# Altium PCB Power_Embedded_Board.PcbDoc (part 1 of 2)
Units mil, origin at the board's own origin, x right, y up, seen from the top; angles counter-clockwise.
Board outline 7315 x 2525 mil, 4 copper layers (Top Layer, Ground, Battery Voltage, Bottom Layer), stack 30.634 mil thick; 158 components, 109 nets, 580 pads, 136 vias.
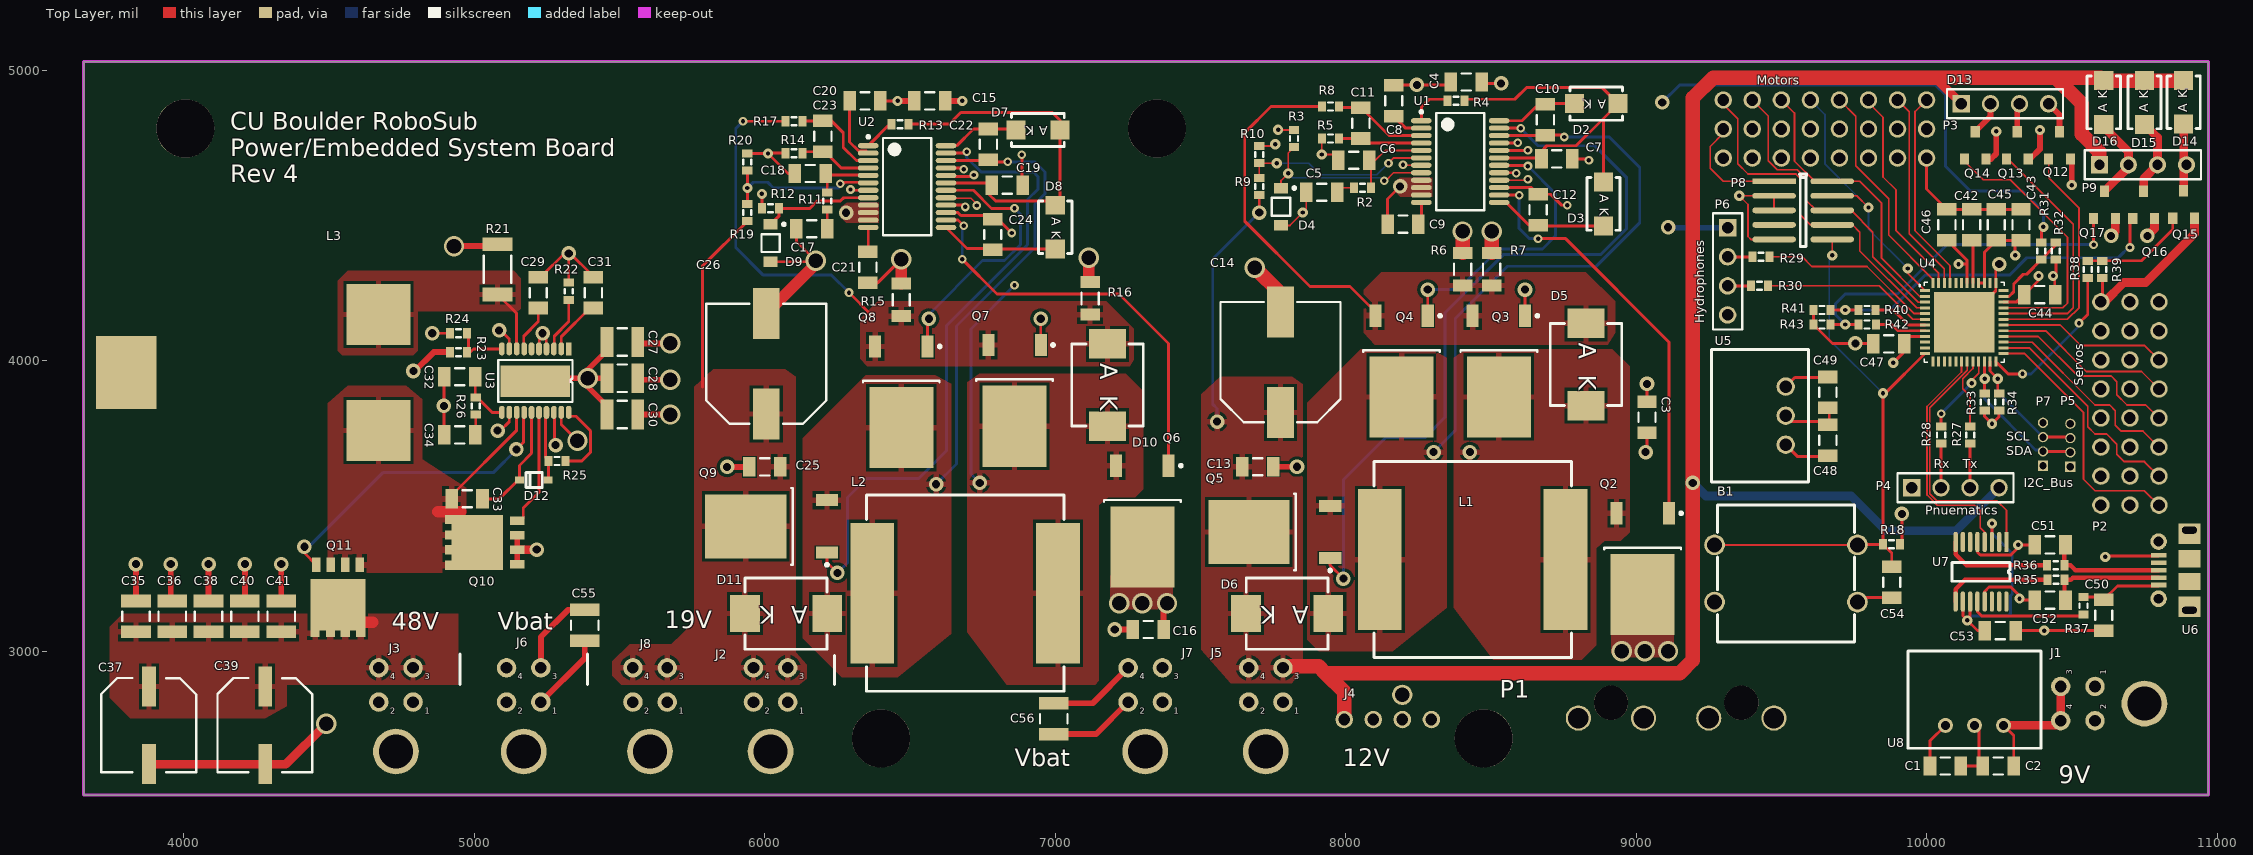
[diagram p0: Top Layer view]
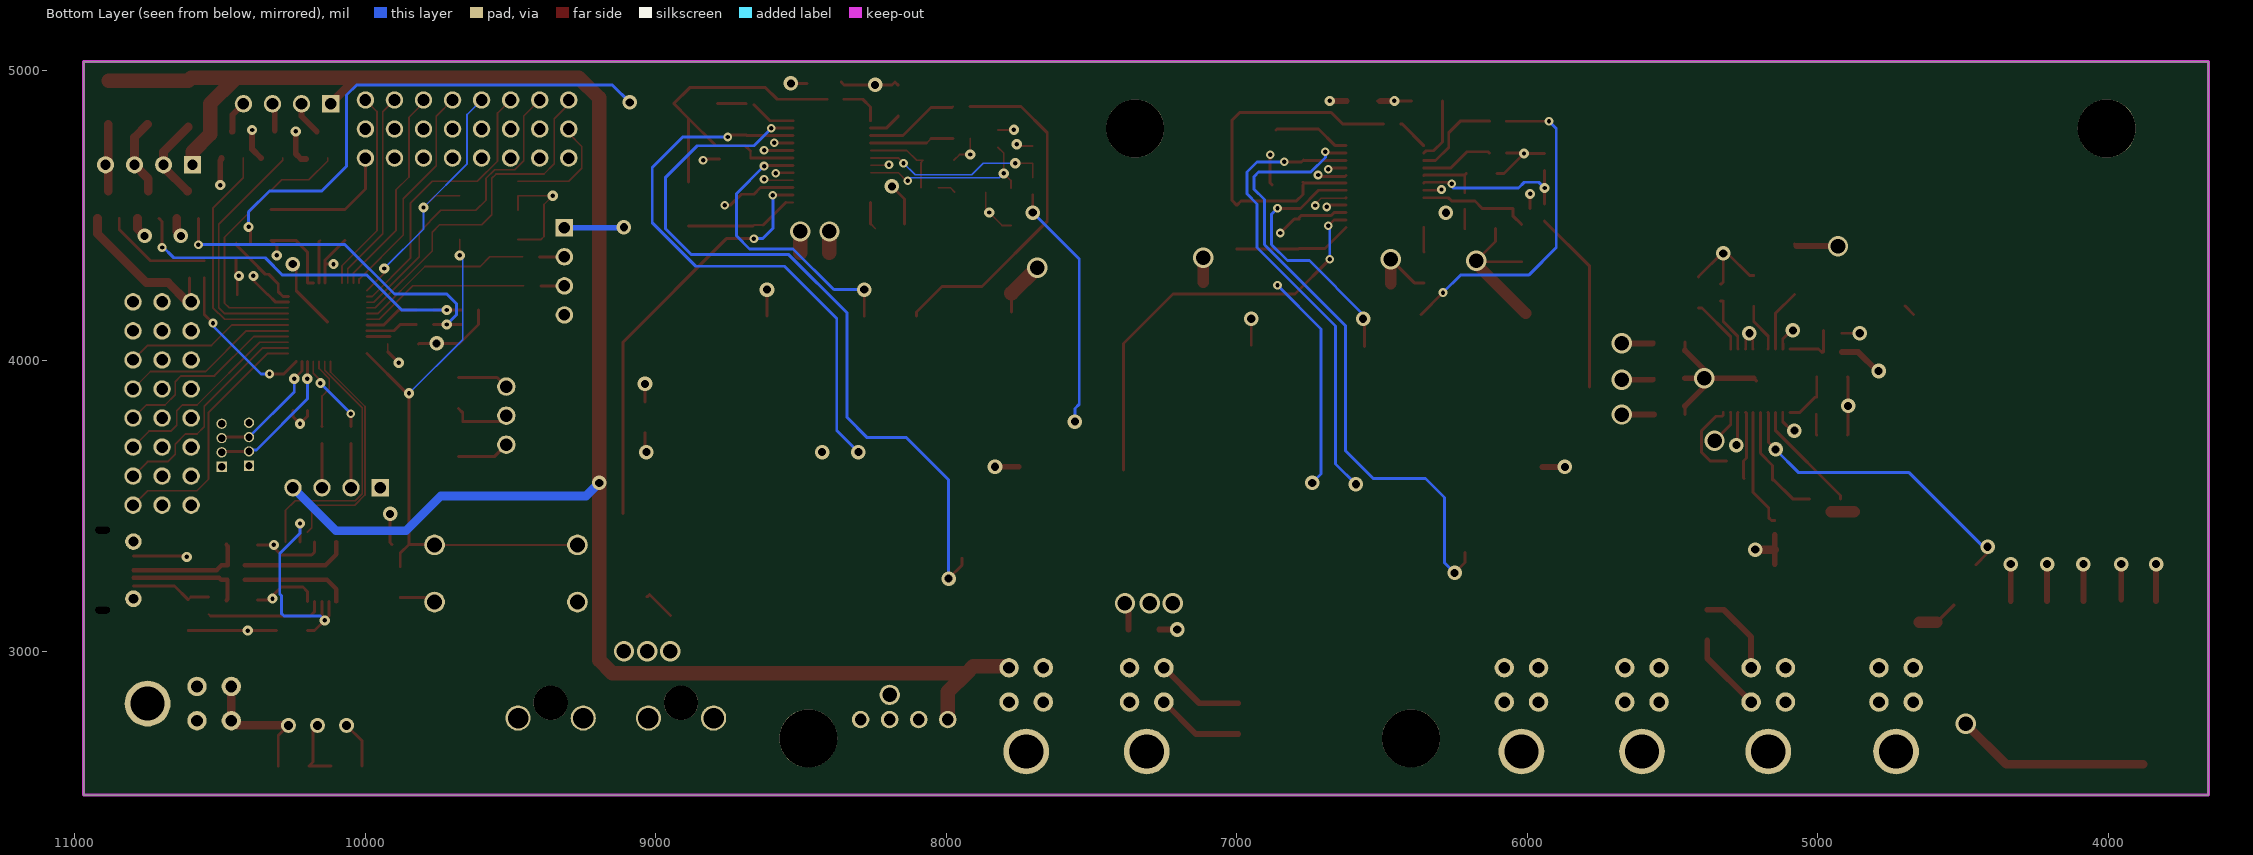
[diagram p1: Bottom Layer view, seen from below]
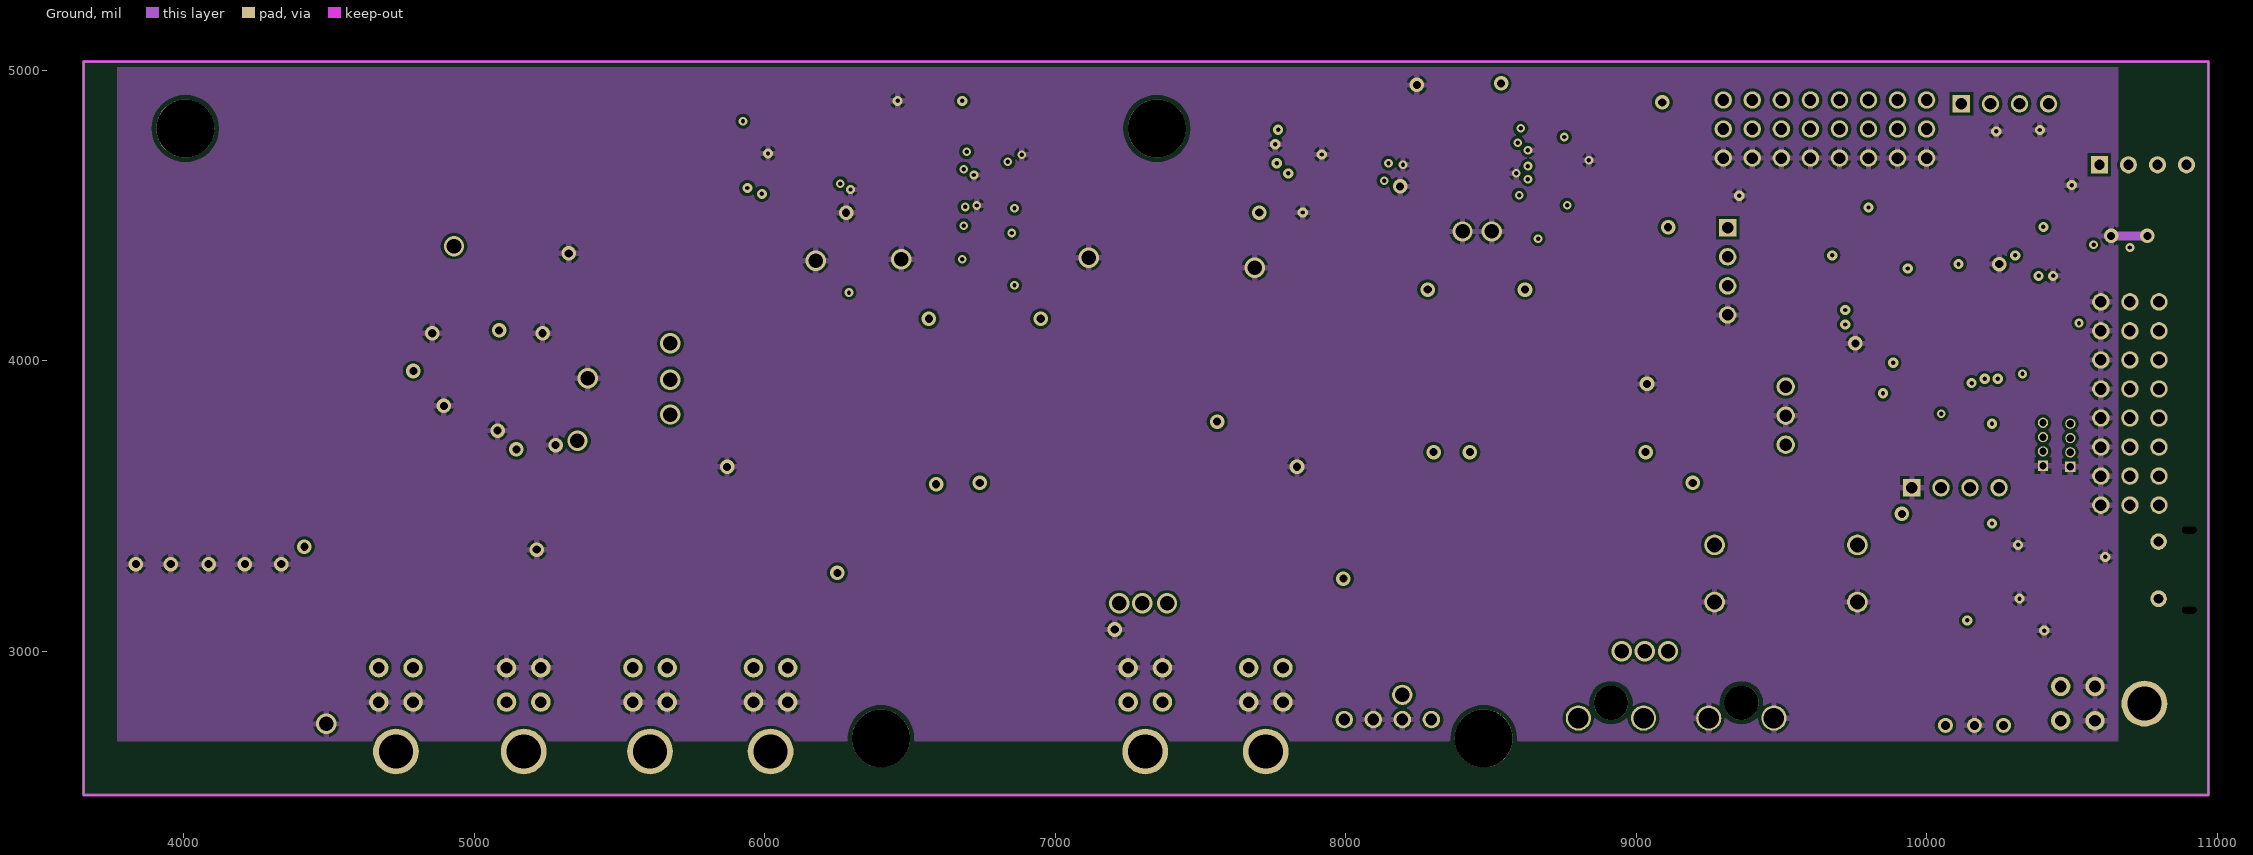
[diagram p2: Ground]
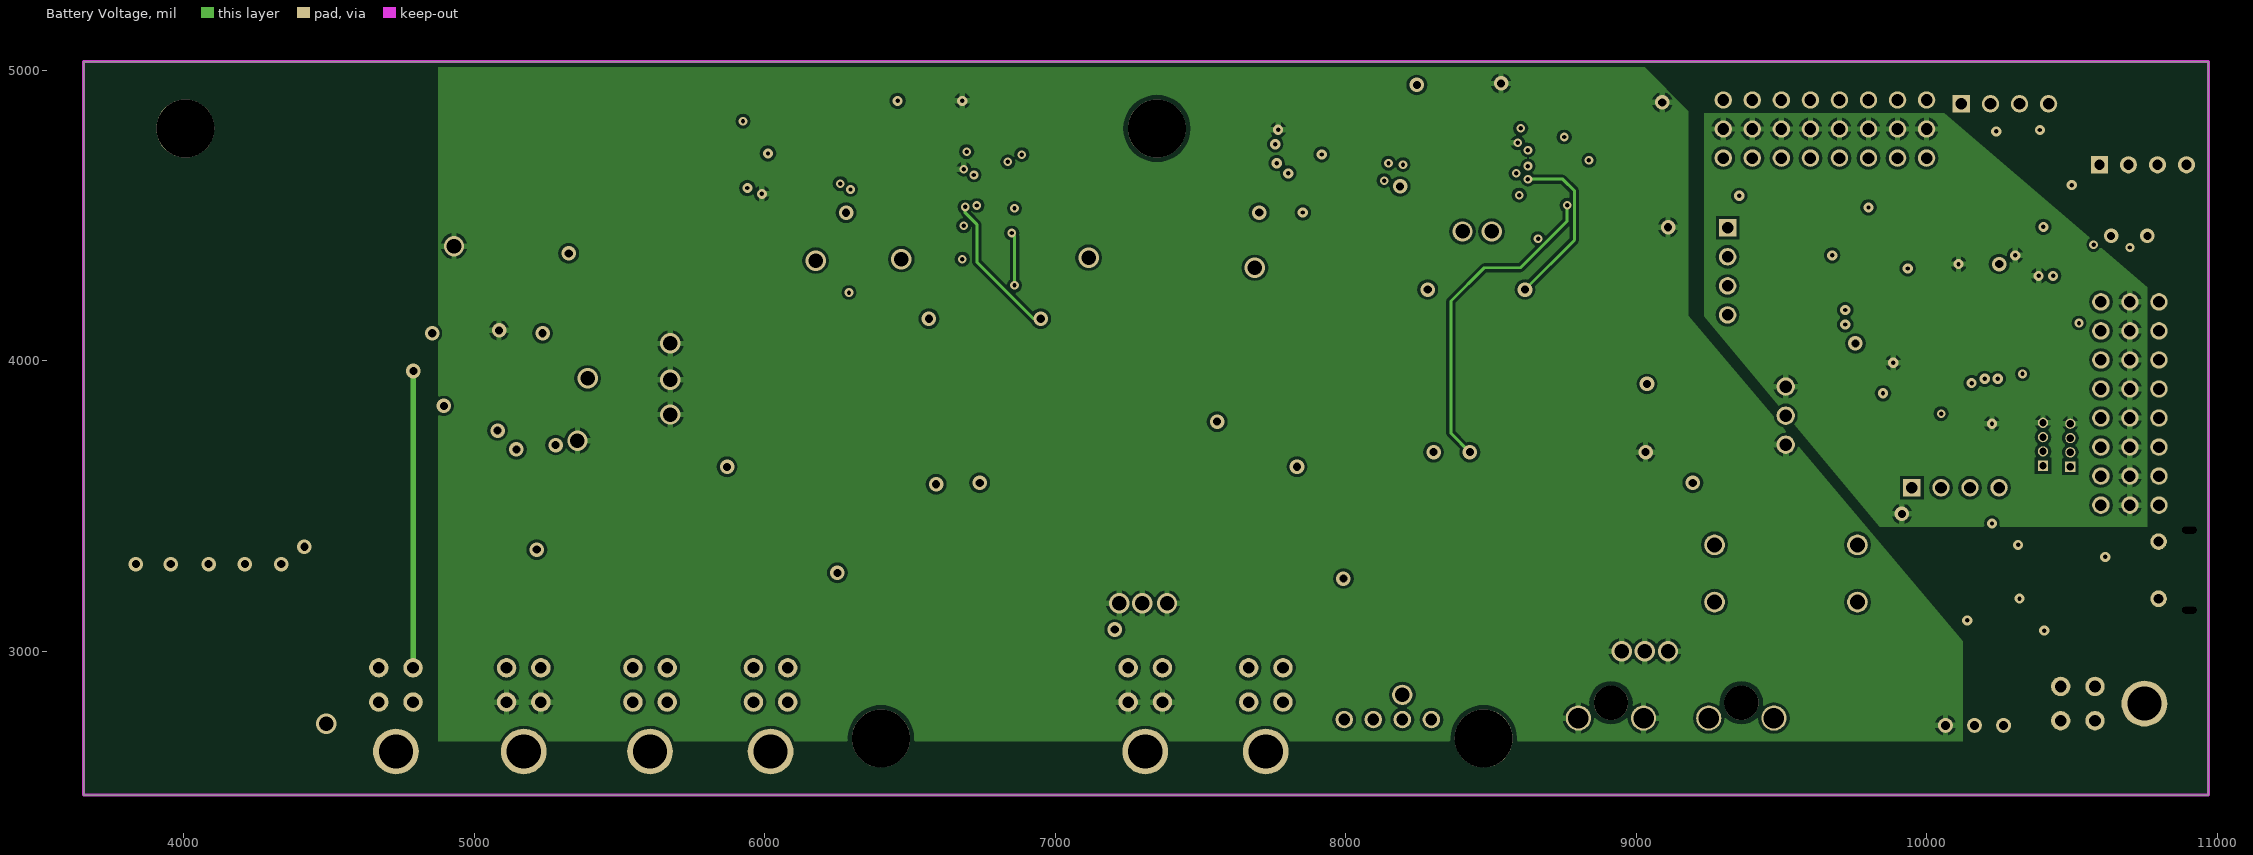
[diagram p3: Battery Voltage]

## Layer stack, top to bottom
Top Solder: solder mask 0.4, Solder Resist, Dk 3.5
Top Layer: signal copper 1.4
Dielectric 1: core 10, FR-4, Dk 4.2
Ground: signal copper 1.417
Dielectric 3: prepreg 5, Dk 4.2
Battery Voltage: signal copper 1.417
Dielectric 2: core 10, Dk 4.2
Bottom Layer: signal copper 1.4
Bottom Solder: solder mask 0.4, Solder Resist, Dk 3.5

## Board outline
3655,2505 10970,2505 10970,5030 3655,5030

## Design rules (kind name [scope] priority, off if disabled: settings)
BoardOutlineClearance [All] p1: gap=7.87 ignorepadtopadclearanceinfootprint=FALSE
Clearance [All] p1: gap=5 ignorepadtopadclearanceinfootprint=TRUE except(3.5: Arc-Arc Arc-Track Arc-SMDPad Track-Track Track-SMDPad SMDPad-SMDPad SMDPad-Fill SMDPad-Poly SMDPad-Region; 10: Arc-Fill Arc-Poly Arc-Region Arc-Hole Track-Fill Track-Poly Track-Region Track-Hole SMDPad-Hole THPad-Fill THPad-Poly THPad-Region THPad-Hole Via-Fill Via-Poly Via-Region Via-Hole Text-Hole; 15: Fill-Hole Poly-Hole Region-Hole)
DiffPairsRouting [All] p1: maxlimit=10 minlimit=10 mostfreqgap=10 toplayer_minwidth=15 toplayer_maxwidth=15 toplayer_prefwidth=15 midlayer1_minwidth=15 midlayer1_maxwidth=15 midlayer1_prefwidth=15 midlayer2_minwidth=15 midlayer2_maxwidth=15 midlayer2_prefwidth=15 bottomlayer_minwidth=15 bottomlayer_maxwidth=15 bottomlayer_prefwidth=15 maxuncoupledlength=500
HoleSize [All] p1: absolutevalues=TRUE maxlimit=248.03 minlimit=7.87 maxpercent=80.000 minpercent=20.000
MinimumAnnularRing [All] p1: minimumring=3
MinimumSolderMaskSliver [All] p1: minsoldermaskwidth=3.5
PolygonConnect PolygonConnect_1 [All vs IsNamedPolygon('GND_TOP_19V','Vbat_TOP_19V','Top Layer-NetC33_1','Vbat_TOP_19V','GND_TOP_12V','Vbat_TOP_12V')] p1: connectstyle=Direct reliefconductorwidth=10 reliefentries=4 polygonreliefangle="90 Angle" airgapwidth=10
PolygonConnect [All] p2: connectstyle=Relief reliefconductorwidth=20 reliefentries=4 polygonreliefangle="90 Angle" airgapwidth=10
RoutingVias [All] p1: holewidth=15 width=30 viastyle="Through Hole" minholewidth=7.87 minwidth=17.72 maxholewidth=30 maxwidth=75
ShortCircuit ShortCircuit1 ['U6-0'] p1: allowed=TRUE // USB_Port
ShortCircuit [All] p2: allowed=FALSE
SilkToSilkClearance [All] p1: silktosilkclearance=0
SilkToSolderMaskClearance [IsPad] p1: minsilkscreentomaskgap=1 clearancetoexposedcopper=TRUE
SolderMaskExpansion [All] p1: expansion=2.5
UnpouredPolygon UnpouredPolygon_1 [All] p1:
UnpouredPolygon [All] p2:
Width [All] p1: maxlimit=200 minlimit=3.5 preferedwidth=10
23 further rules are at their usual default settings.

## Classes and differential pairs
component class "9V Converter": C1 C2 U8
component class "48V Converter": C27 C28 C29 C30 C31 C32 C33 C34 C35 C36 C37 C38 C39 C40 C41 D12 L3 Q10 Q11 R21 R22 R23 R24 R25 R26 U3
component class "12V Conterter": C3 C4 C5 C6 C7 C8 C9 C10 C11 C12 C13 C14 D2 D3 D4 D5 D6 L1 Q2 Q3 Q4 Q5 R2 R3 R4 R5 R6 R7 R8 R9 R10 U1
component class "19V Converter": C15 C16 C17 C18 C19 C20 C21 C22 C23 C24 C25 C26 D7 D8 D9 D10 D11 L2 Q6 Q7 Q8 Q9 R11 R12 R13 R14 R15 R16 R17 R19 R20 U2
component class "Embedded Circuits": B1 C48 C49 C50 C51 C52 C53 C54 D13 D14 D15 D16 P8 P9 Q12 Q13 Q14 Q15 Q16 Q17 R18 R35 R36 R37 R38 R39 R40 R41 R42 R43 U5 U6 U7
component class "Embedded System": P2 P3 P4 P5 P6 P7 R27 R28 R29 R30
component class Power_Embedded_Board_Top: C55 C56 J1 J2 J3 J4 J5 J6 J7 J8 P1
component class Embedded_Chip: C42 C43 C44 C45 C46 C47 R31 R32 R33 R34 U4
differential pair USBData: +USBData_P -USBData_N
differential pair USBD: +USBD_P -USBD_N

## Components (designator, comment, footprint, x,y, rotation, side; value= is the part's Value field where it differs from the comment)
B1 "Push Button" "PUSH BUTTON" 9270,3169.45 r0 top
C1 "Cap" C1206 10065,2605 r180 top value=22uF
C2 "Cap" C1206 10246.85,2605 r0 top value=22uF
C3 "Cap Semi" C1206 9037.39,3805.53 r270 top value=22u
C4 "Cap Semi" C1206 8415,4960 r0 top value=3.3u
C5 "Cap Semi" C1206 7917.39,4580.53 r0 top value=0.01u
C6 "Cap Semi" C1206 8027.39,4690.53 r0 top value=100p
C7 "Cap Semi" C1206 8727.39,4695.53 r180 top value=4.7u
C8 "Cap Semi" C1206 8165.54,4895.53 r270 top value=0.001u
C9 "Cap Semi" C1206 8197.39,4470.53 r0 top value=0.001u
C10 "Cap Semi" C1206 8687.39,4830.53 r90 top value=0.22u
C11 "Cap Semi" C1206 8052.39,4818.68 r90 top value=100p
C12 "Cap Semi" C1206 8662.39,4520.53 r270 top value=0.22u
C13 "Cap Semi" C1206 7697.39,3635.53 r180 top value=22u
C14 "390uF" PCVXXXXXMCLXGS 7775.54,3995.53 r90 top
C15 "Cap Semi" C1206 6568.15,4895 r0 top value=22u
C16 "Cap Semi" C1206 7320,3075 r0 top value=3.3u
C17 "Cap Semi" C1206 6161.85,4455 r0 top value=0.01u
C18 "Cap Semi" C1206 6156.85,4645 r0 top value=100p
C19 "Cap Semi" C1206 6835,4605 r180 top value=4.7u
C20 "Cap Semi" C1206 6345,4895 r180 top value=0.001u
C21 "Cap Semi" C1206 6355,4321.85 r90 top value=0.001u
C22 "Cap Semi" C1206 6770,4745 r90 top value=0.22u
C23 "Cap Semi" C1206 6200,4773.15 r90 top value=100p
C24 "Cap Semi" C1206 6785,4435 r270 top value=0.22u
C25 "Cap Semi" C1206 6000,3635 r0 top value=22u
C26 "390uF" PCVXXXXXMCLXGS 6005,3990 r90 top
C27 "HMK325C7475KN-TE" C1210 5510,4065 r0 top value=4.7uF
C28 "HMK325C7475KN-TE" C1210 5510,3940 r0 top value=4.7uF
C29 "Cap Semi" C1206 5220,4235 r90 top value=47nF
C30 "HMK325C7475KN-TE" C1210 5510,3815 r0 top value=4.7uF
C31 "Cap Semi" C1206 5410,4235 r270 top value=4.7uF
C32 "Cap Semi" C1206 4950,3945 r0 top value=100pF
C33 "Cap Semi" C1206 4975,3525 r0 top value=100nF
C34 "Cap Semi" C1206 4950,3745 r0 top value=15nF
C35 "HMK325C7475KN-TE" C1210 3835,3120 r270 top value=4.7uF
C36 "HMK325C7475KN-TE" C1210 3960,3120 r270 top value=4.7uF
C37 "33uF" UUX1J330MNL6GS 3880,2745 r270 top
C38 "HMK325C7475KN-TE" C1210 4085,3120 r270 top value=4.7uF
C39 "33uF" UUX1J330MNL6GS 4280,2745 r270 top
C40 "HMK325C7475KN-TE" C1210 4210,3120 r270 top value=4.7uF
C41 "HMK325C7475KN-TE" C1210 4335,3120 r270 top value=4.7uF
C42 "Cap Semi" C1206 10155,4468.15 r90 top value=1uF
C43 "Cap Semi" C1206 10325,4468.15 r270 top value=10nF
C44 "Cap Semi" C1206 10390,4228.15 r180 top value=10nF
C45 "Cap Semi" C1206 10240,4468.15 r270 top value=100nF
C46 "Cap Semi" C1206 10070,4468.15 r270 top value=100nF
C47 "Cap Semi" C1206 9870,4058.15 r0 top value=10uF
C48 "Cap" C1206 9660,3726.3 r270 top value=10uF
C49 "Cap" C1206 9660,3891.3 r90 top value=10uF
C50 "Cap" C1206 10610,3124.45 r90 top value=10nF
C51 "Cap" C1206 10425,3366.3 r0 top value=47pF
C52 "Cap" C1206 10425,3176.3 r0 top value=47pF
C53 "Cap" C1206 10253.15,3071.3 r180 top value=100nF
C54 "Cap Semi" C1206 9880,3238.15 r90 top value=1nF
C55 "HMK325C7475KN-TE" C1210 5380,3090 r90 top value=4.7uF
C56 "HMK325C7475KN-TE" C1210 6995,2768.15 r90 top value=4.7uF
D2 "1N5819HW" 1N58XX 8938.17,4885.53 r180 top
D3 "1N5819HW" 1N58XX 8887.39,4615.53 r270 top
D4 "MMSZ5230B" ONSC-SOD-123-2-425-04_V 7777.39,4530.53 r270 top
D5 "MBRS340" MBRS340 8827.39,4129 r270 top
D6 "MBRS340" MBRS340 7940,3130 r180 top
D7 "1N5819HW" 1N58XX 7015.79,4795 r180 top
D8 "1N5819HW" 1N58XX 7000,4535.79 r270 top
D9 "MMSZ5230B" ONSC-SOD-123-2-425-04_V 6020,4405.63 r270 top
D10 "MBRS340" MBRS340 7180,4058.46 r270 top
D11 "MBRS340" MBRS340 6215,3130 r180 top
D12 "SCHOTTKY" BAS170W 5253.43,3590 r180 top
D13 "RGB LED Strip" "HEADER 1X4" 10120,4885 r0 top
D14 "1N58xx" 1N58XX 10885,4815 r90 top
D15 "1N58xx" 1N58xx 10750,4814.21 r90 top
D16 "1N58xx" 1N58xx 10610,4814.21 r90 top
J1 "Molex 43045-0402" MOLEX43045-0402 10579.92,2760.94 r90 top
J2 "Molex 43045-0402" MOLEX43045-0402 5960.94,2825.08 r0 top
J3 "Molex 43045-0402" MOLEX43045-0402 4670.94,2825.08 r0 top
J4 "Floppy Header" "HEADER 1X4 12V" 8295,2764.96 r180 top
J5 "Molex 43045-0402" MOLEX43045-0402 7665.94,2825.08 r0 top
J6 "Molex 43045-0402" MOLEX43045-0402 5110.94,2825.08 r0 top
J7 "Molex 43045-0402" MOLEX43045-0402 7250.94,2825.08 r0 top
J8 "Molex 43045-0402" MOLEX43045-0402 5545.94,2825.08 r0 top
L1 "IHLP-6767DZ-11" IHLP-6767DZ-11 8756.95,3315.53 r180 top
L2 "IHLP-6767DZ-11" IHLP-6767DZ-11 7009.57,3200 r180 top
L3 "330 uH" PQ2617BHA-330K 4105,3960 r90 top
P1 "Molex2002411114" Molex2002411114 9137.8,2770 r180 top
P2 "Header 8X3" "HEADER 8X3" 10800,4203.15 r180 top
P3 "Header 8X3" "HEADER 8X3" 9300,4898.15 r270 top
P4 "Header 4" "HEADER 1X4" 9949.53,3563.15 r0 top
P5 "Depth Sensor header" DF13-4P-1.25DSA 10495,3635.79 r90 top
P6 "Header 4" "HEADER 1X4" 9315,4458.15 r270 top
P7 "Header 4" DF13-4P-1.25DSA 10400.79,3638.94 r90 top
P8 "FTSH-105-01-L-DV-K-TR" FTSH-105-01-L-DV-K-TR 9475,4618.15 r0 top
P9 "Header 4" HDR1X4 10595,4675 r0 top
Q2 "BUK6212" NXP-SOT428_M 9022.39,3286.09 r270 top
Q3 "BUK6212" NXP-SOT428_M 8527.39,3966.09 r270 top
Q4 "BUK6212" NXP-SOT428_M 8192.39,3966.09 r270 top
Q5 "BUK6212" NXP-SOT428_M 7757.39,3410.53 r180 top
Q6 "BUK6212" NXP-SOT428_M 7300,3450 r270 top
Q7 "BUK6212" NXP-SOT428_M 6860,3865.55 r270 top
Q8 "BUK6212" NXP-SOT428_M 6470,3860.55 r270 top
Q9 "BUK6212" NXP-SOT428_M 6025,3430 r180 top
Q10 "N-Channel MOSFET" BSC028N06LS3 5010,3375 r0 top
Q11 "N-Channel MOSFET" BSC028N06LS3 4530,3160 r90 top
Q12 "DMN1019USN" SOT-23 10420.2,4695 r0 top
Q13 "DMN1019USN" SOT-23 10275,4695 r0 top
Q14 "DMN1019USN" SOT-23 10130,4695 r0 top
Q15 "DMN1019USN" SOT-23 10847.6,4490.51 r0 top
Q16 "DMN1019USN" SOT-23 10710,4490 r0 top
Q17 "DMN1019USN" SOT-23 10575.2,4490 r0 top
R2 "Res3" J1-0603 8057.39,4595.53 r0 top value=100k
R3 "Res3" J1-0603 7822.39,4765.53 r90 top value=51k
R4 "Res3" J1-0603 8380,4895 r180 top value=100k
R5 "Res3" J1-0603 7947.39,4765.53 r180 top value=100
R6 "Res3" R1206 8402.39,4315.53 r270 top value=0.018
R7 "Res3" R1206 8502.39,4315.53 r270 top value=0.018
R8 "Res3" J1-0603 7947.39,4875.53 r180 top value=100
R9 "Res3" J1-0603 7702.39,4600.53 r270 top value=280k
R10 "Res3" J1-0603 7702.39,4710.06 r270 top value=20k
R11 "Res3" J1-0603 6215,4550 r90 top value=100k
R12 "Res3" J1-0603 6020,4525 r180 top value=51k
R13 "Res3" J1-0603 6465,4815 r180 top value=100k
R14 "Res3" J1-0603 6100.47,4715 r180 top value=100
R15 "Res3" R1206 6470,4210 r270 top value=0.018
R16 "Res3" R1206 7120,4215 r270 top value=0.018
R17 "Res3" J1-0603 6100.47,4825 r180 top value=100
R18 "Res3" J1-0603 9879.53,3368.15 r0 top value=47k
R19 "Res3" J1-0603 5940,4510.47 r270 top value=113k
R20 "Res3" J1-0603 5940,4684.53 r270 top value=2k
R21 "Res3" 12Z-2010 5080,4315 r90 top value=3m
R22 "Res3" J1-0603 5325,4239.53 r90 top value=30.1K
R23 "Res3" J1-0603 4945.47,4030 r0 top value=390K
R24 "Res3" J1-0603 4945.47,4095 r0 top value=10K
R25 "Res3" J1-0603 5285,3655 r180 top value=100K
R26 "Res3" J1-0603 5005,3845 r90 top value=15K
R27 "Res3" J1-0603 10150,3744.53 r270 top value=20
R28 "Res3" J1-0603 10050,3744.53 r270 top value=20
R29 "Res3" J1-0603 9430,4358.15 r0 top value=20
R30 "Res3" J1-0603 9425,4258.15 r0 top value=20
R31 "Res3" J1-0603 10395,4378.15 r90 top value=10K
R32 "Res3" J1-0603 10445,4378.15 r90 top value=2K
R33 "Res3" J1-0603 10200,3858.15 r90 top value=4.7K
R34 "Res3" J1-0603 10250,3858.15 r90 top value=4.7K
R35 "Res3" J1-0603 10445.47,3246.3 r0 top value=27
R36 "Res3" J1-0603 10444.53,3296.3 r180 top value=27
R37 "Res3" J1-0603 10540,3156.77 r270 top value=0
R38 "Res3" J1-0603 10555,4315 r90 top value=1k
R39 "Res3" J1-0603 10605,4315 r90 top value=10k
R40 "Res3" J1-0603 9795,4175 r180 top value=1k
R41 "Res3" J1-0603 9640.47,4175 r0 top value=10k
R42 "Res3" J1-0603 9795.47,4125 r180 top value=1k
R43 "Res3" J1-0603 9640.47,4125 r0 top value=10k
U1 "LTC3780EG#PBF" LT-G-24_L 8394.39,4685.97 r0 top
U2 "LTC3780EG#PBF" LT-G-24_L 6490,4600 r0 top
U3 "LTC3769" LTC3769 5325,4041.22 r270 top
U4 "EFM32PG12B500F1024IM48-C" QFN50P700X700X90-49N 10130,4133.15 r0 top
U5 "R-78E3.3-1.0" R-78EXX-1.0 9515,3711.3 r90 top
U6 "Micro USB" "MICRO USB" 10905,3153.39 r90 top
U7 "FT230x" FT230X 10275,3376.3 r270 top
U8 "R-78E9.0-0.5" R-78Exx-0.5 10065,2745 r0 top

## Footprints (in the part's own frame and the unit in brackets; to place one, negate y for a bottom-side part, rotate by r counter-clockwise, add the part's x,y. Pads: shape width x height; smd on the part's side, far side on the other; paste and mask are expansions set on the pad)
1N58XX [mm] "1A Schottky Barrier Rectifier Diode"
  rect 1.655x1.67 smd: A(0,0) K(3.83,0)
  silkscreen extent -0.39,-1.45 4.22,1.45
1N58xx [mm] "1A Schottky Barrier Rectifier Diode"
  rect 1.655x1.67 smd: A(0,0) K(3.83,0)
  silkscreen extent -0.39,-1.45 4.22,1.45
12Z-2010 [mm] "Chip Resistor, Body 5.0x2.5mm, IPC High Density"
  rect 1.2x2.6 smd: 1(-2.2,0) 2(2.2,0)
  silkscreen extent -1.2,-1.2 1.2,1.2, body extent -2.58,-1.33 2.58,1.33, height 0.9
BAS170W [mm] "SCHOTTKY DIODE"
  rect 0.8x0.6 smd: A(0,0) K(2.5,0)
  silkscreen extent 0.5,-0.65 1.92,0.65
BSC028N06LS3 [mm] "N-Channel MOSFET"
  rect 1.3x0.75 smd: 1(3.5,-1.9) 2(3.5,-0.635) 3(3.5,0.635) 4(3.5,1.9)
  rect 0.6x0.8 smd: 5(-2.5,2) 6(-2.5,0.65) 7(-2.5,-0.65) 8(-2.5,-2)
  rect 4.5x4.8 smd: 9(0,0)
C1206 [mm] "Chip Capacitor, Body 3.2x1.6mm, IPC High Density"
  rect 1.1x1.7 smd: 1(-1.35,0) 2(1.35,0)
  silkscreen extent -0.4,-0.75 0.4,0.75, body extent -1.7,-0.9 1.7,0.9, height 1.3
C1210 [mm] "Chip Capacitor, Body 3.2x2.5mm, IPC High Density"
  rect 1.1x2.6 smd: 1(-1.35,0) 2(1.35,0)
  silkscreen extent -0.4,-1.2 0.4,1.2, body extent -1.7,-1.35 1.7,1.35, height 1.3
DF13-4P-1.25DSA [mm] "Depth Sensor Header footprint"
  rect 0.9x0.9 hole 0.65: 1(0,0)
  round 0.9 hole 0.65: 2(1.25,0) 3(2.5,0) 4(3.75,0)
FT230X [mil] "USB to BASIC UART IC"
  rect 70x15 smd: 1(0,0)
  oval 70x15 smd: 2(0,-25) 3(0,-50) 4(0,-75) 5(0,-100) 6(0,-125) 7(0,-150) 8(0,-175) 9(205,-175) 10(205,-150) 11(205,-125) 12(205,-100) 13(205,-75) 14(205,-50) 15(205,-25) 16(205,0)
  silkscreen extent 70,-188 135,13
FTSH-105-01-L-DV-K-TR [mil] "CONN HEADER 10POS DUAL .05\" SMD"
  rect 150x20 smd: 1(0,0)
  oval 150x20 smd: 2(200,0) 3(0,-50) 4(200,-50) 5(0,-100) 6(200,-100) 7(0,-150) 8(200,-150) 9(0,-200) 10(200,-200)
  silkscreen extent 88,-225 112,25
HDR1X4 [mm] "Connector; Header; 4 Position"
  rect 1.5x1.5 hole 0.9: 1(0,0)
  round 1.5 hole 0.9: 2(2.54,0) 3(5.08,0) 4(7.62,0)
  silkscreen extent -1.27,-1.27 8.89,1.27
"HEADER 1X4" [mil]
  rect 60x60 hole 40: 1(0,0)
  round 60 hole 40: 2(100,0) 3(200,0) 4(300,0)
  silkscreen extent -50,-50 350,50
"HEADER 1X4 12V" [mm]
  round 1.778 hole 1.25: 0(2.54,-2.16)
  round 1.528 hole 1.02: 1(0,0) 2(2.54,0) 3(5.08,0) 4(7.62,0)
"HEADER 8X3" [mil] "Connector Header Through Hole 24 position 0.1\""
  round 60 hole 40: 1(0,700) 2(100,700) 3(200,700) 4(0,600) 5(100,600) 6(200,600) 7(0,500) 8(100,500) 9(200,500) 10(0,400) 11(100,400) 12(200,400) 13(0,300) 14(100,300) 15(200,300) 16(0,200) 17(100,200) 18(200,200) 19(0,100) 20(100,100) 21(200,100) 22(0,0) 23(100,0) 24(200,0)
IHLP-6767DZ-11 [mm] "15µH Shielded Molded Inductor 14A 14.4 mOhm Max Nonstandard"
  rect 3.825x12.32 smd: 1(0,0) 2(16.245,0)
  silkscreen extent -0.52,-8.57 16.77,8.57
J1-0603 [mm] "Chip Resistor, Body 1.6x0.8mm, IPC High Density"
  rect 0.7x0.9 smd: 1(-0.75,0) 2(0.75,0)
  silkscreen extent -0.2,-0.35 0.2,0.35, body extent -0.85,-0.48 0.85,0.48, height 0.9
LT-G-24_L [mm] "SOP, 24-Leads, Body 8.5x5.6mm, Pitch 0.65mm, IPC High Density"
  oval 1.8x0.45 smd mask+0.055: 1(-3.4,3.575) 2(-3.4,2.925) 3(-3.4,2.275) 4(-3.4,1.625) 5(-3.4,0.975) 6(-3.4,0.325) 7(-3.4,-0.325) 8(-3.4,-0.975) 9(-3.4,-1.625) 10(-3.4,-2.275) 11(-3.4,-2.925) 12(-3.4,-3.575) 13(3.4,-3.575) 14(3.4,-2.925) 15(3.4,-2.275) 16(3.4,-1.625) 17(3.4,-0.975) 18(3.4,-0.325) 19(3.4,0.325) 20(3.4,0.975) 21(3.4,1.625) 22(3.4,2.275) 23(3.4,2.925) 24(3.4,3.575)
  silkscreen extent -3.52,-4.25 2.1,4.47, body extent -2.8,-4.25 2.8,4.25, height 2
LTC3769 [mm]
  rect 1.15x0.5 smd: 1(0,0)
  oval 1.15x0.5 smd: 2(0,-0.65) 3(0,-1.3) 4(0,-1.95) 5(0,-2.6) 6(0,-3.25) 7(0,-3.9) 8(0,-4.55) 9(0,-5.2) 10(0,-5.85) 11(5.55,-5.85) 12(5.55,-5.2) 13(5.55,-4.55) 14(5.55,-3.9) 15(5.55,-3.25) 16(5.55,-2.6) 17(5.55,-1.95) 18(5.55,-1.3) 19(5.55,-0.65) 20(5.55,0)
  rect 2.74x6.07 smd: 21(2.825,-2.921)
  silkscreen extent 0.97,-6.18 4.65,0.33
MBRS340 [mm] "Schottky Rectifier"
  rect 2.6x3.2 smd: A(0,0) K(7.2,0)
  silkscreen extent 0.02,-3.13 7.17,3.13
"MICRO USB" [mm] "USB - micro B USB 2.0 Receptacle Connector 5 Position Surface Mount, Right Angle"
  round 0 hole 0.6 slot 1.3 at 90 deg unplated: 0(-0.3,0) 0(6.7,0)
  rect 1.8x1.9 smd: 0(0,0) 0(6.4,0)
  round 1.45 hole 0.85: 0(0.7,2.7) 0(5.7,2.7)
  rect 1.5x1.9 smd: 0(2.2,0) 0(4.2,0)
  rect 0.4x1.35 smd: 1(1.9,2.7) 2(2.55,2.7) 3(3.2,2.7) 4(3.85,2.7) 5(4.5,2.7)
MOLEX43045-0402 [mm] "43045-0402"
  round 1.7 hole 1.02: 1(3,0) 2(0,0) 3(3,3) 4(0,3)
  round 4 hole 3 unplated: ""(1.5,-4.32)
  body extent -3.57,-8.95 6.58,3.29, height 8.83
Molex2002411114 [mm]
  round 2.2 hole 1.8: 1(-8.55,0) 2(-2.85,0) 3(2.85,0) 4(8.55,0)
  round 3 hole 3 unplated: ""(-5.7,-1.34) ""(5.7,-1.34)
  body extent -11.72,-3.39 11.73,7.21, height 17.5
NXP-SOT428_M [mm] "DPAK, 3-Leads, Body 6.75x6.22mm, Pitch 2.29mm, IPC Low Density"
  rect 7.1x5.6 smd: D(2.3,0)
  rect 1.95x1.05 smd: G(-4.8,2.29) S(-4.8,-2.29)
  silkscreen extent -4.92,-3.35 -1.65,3.49, body extent -1.8,-3.37 4.42,3.37, height 2.38
ONSC-SOD-123-2-425-04_V [mm] "SOD, 2-Leads, Body 2.69x1.6mm"
  rect 0.91x1.22 smd: 1(-1.635,0) 2(1.635,0)
  silkscreen extent -1.76,-0.8 0.78,1.29, body extent -1.35,-0.8 1.35,0.8, height 1.35
PCVXXXXXMCLXGS [mm] "Aluminum Electrolytic Capacitor, Body 10.30x10.30x12.70mm, IPC Low Density"
  rect 4.45x2.35 smd: 1(-4.4,0) 2(4.4,0)
  silkscreen extent -5.25,-5.25 5.25,5.25, body extent -5.25,-5.25 5.25,5.25, height 12.7
PQ2617BHA-330K [mm] "Inductor"
  rect 5.33x5.59 smd: 1(-5.075,-14.355) 2(5.075,-14.355)
  rect 6.35x5.28 smd: NC(0,7.72)
"PUSH BUTTON" [mm] "Tactile Switch SPST-NO Top Actuated Through Hole"
  round 1.808 hole 1.3: 1(12.5,0) 2(0,0) 3(12.5,5) 4(0,5)
  silkscreen extent 0.25,-3.5 12.25,8.5
QFN50P700X700X90-49N [mm]
  rect 5.3x5.3 smd: 0(0,0)
  rect 0.86x0.26 smd: 1(-3.435,2.75) 2(-3.435,2.25) 3(-3.435,1.75) 4(-3.435,1.25) 5(-3.435,0.75) 6(-3.435,0.25) 7(-3.435,-0.25) 8(-3.435,-0.75) 9(-3.435,-1.25) 10(-3.435,-1.75) 11(-3.435,-2.25) 12(-3.435,-2.75) 25(3.435,-2.75) 26(3.435,-2.25) 27(3.435,-1.75) 28(3.435,-1.25) 29(3.435,-0.75) 30(3.435,-0.25) 31(3.435,0.25) 32(3.435,0.75) 33(3.435,1.25) 34(3.435,1.75) 35(3.435,2.25) 36(3.435,2.75)
  rect 0.26x0.86 smd: 13(-2.75,-3.435) 14(-2.25,-3.435) 15(-1.75,-3.435) 16(-1.25,-3.435) 17(-0.75,-3.435) 18(-0.25,-3.435) 19(0.25,-3.435) 20(0.75,-3.435) 21(1.25,-3.435) 22(1.75,-3.435) 23(2.25,-3.435) 24(2.75,-3.435) 37(2.75,3.435) 38(2.25,3.435) 39(1.75,3.435) 40(1.25,3.435) 41(0.75,3.435) 42(0.25,3.435) 43(-0.25,3.435) 44(-0.75,3.435) 45(-1.25,3.435) 46(-1.75,3.435) 47(-2.25,3.435) 48(-2.75,3.435)
  silkscreen extent -4,-3.5 3.5,3.5
R1206 [mm] "Chip Resistor, 2-Leads, Body 3.10x1.60mm, IPC Medium Density"
  rect 1.05x1.7 smd: 1(-1.425,0) 2(1.425,0)
  silkscreen extent -0.5,-0.75 0.5,0.75, body extent -1.6,-0.85 1.6,0.85, height 0.65
R-78Exx-0.5 [mm] "0.5A DC/DC Voltage Converter"
  round 1.308 hole 0.8: 1(0,0) 2(2.54,0) 3(5.08,0)
  silkscreen extent -3.26,-2 8.34,6.5
R-78EXX-1.0 [mm] "1A DC/DC Voltage Converter"
  round 1.608 hole 1.1: 1(0,0) 2(2.54,0) 3(5.08,0)
  silkscreen extent -3.26,-2 8.34,6.5
SOT-23 [mm]
  rect 0.8x1 smd: D(0.95,2.4) G(0,0) S(1.9,0)
  body extent -0.58,0.5 2.47,1.9, height 1.15
UUX1J330MNL6GS [mm]
  rect 3.5x1.2 smd: 1(-3.4,0) 2(3.4,0)
  silkscreen extent -4.15,-4.18 4.1,4.13, body extent -4.15,-4.15 4.15,4.15, height 12.7

## Part data
B1: "Tactile Switch SPST-NO Top Actuated Through Hole", Digikey Link=https://www.digikey.com/product-detail/en/te-connectivity-alcoswitch-switches/FSM101/450-1157-ND/701084, Drawing=https://www.te.com/commerce/DocumentDelivery/DDEController?Action=srchrtrv&DocNm=1571140&DocType=Customer+Drawing&DocLang=English
C1 C2 C27 C28 C30 C35 C36 C38 C40 C41 C55 C56: library part "Cap Semi", "Capacitor (Semiconductor SIM Model)", LatestRevisionDate=29-May-2009, LatestRevisionNote="IPC-7351 Footprint Added.", PackageDescription="Chip Capacitor", PackageReference=C1206, Published=8-Jun-2000, Publisher="Altium Limited"
  C27 C28 C30 C35 C36 C38 C40 C41 C55 C56: ComponentLink1Description=Datasheet, ComponentLink1URL=https://www.yuden.co.jp/productdata/catalog/mlcc06_e.pdf, ComponentLink2Description=Digi-Key, ComponentLink2URL=https://www.digikey.com/product-detail/en/taiyo-yuden/HMK325C7475KN-TE/587-5038-1-ND/6563881
C3 C4 C5 C6 C7 C8 C9 C10 C11 C12 C13 C15 C16 C17 C18 C19 C20 C21 C22 C23 C24 C25 C29 C31 C32 C33 C34 C42 C43 C44 C45 C46 C47: "Capacitor (Semiconductor SIM Model)", LatestRevisionDate=29-May-2009, LatestRevisionNote="IPC-7351 Footprint Added.", PackageDescription="Chip Capacitor", PackageReference=C1206, Published=8-Jun-2000, Publisher="Altium Limited"
C14 C26: library part PCV1E391MCL2GS, "CAP ALUM POLY 390UF 20% 25V SMD", Datasheet=http://nichicon-us.com/english/products/pdfs/e-pcv.pdf, Digikey=https://www.digikey.com/product-detail/en/nichicon/PCV1E391MCL2GS/493-4544-1-ND/2786841
C37 C39: library part UUX1J330MNL6GS, "CAP ALUM 33UF 20% 63V SMD", ComponentLink1Description=Digi-Key, ComponentLink1URL=https://www.digikey.com/product-detail/en/nichicon/UUX1J330MNL6GS/493-9972-1-ND/3974043, ComponentLink2Description=Datasheet, ComponentLink2URL=https://www.nichicon.co.jp/english/products/pdfs/e-uux.pdf, Datasheet=http://nichicon-us.com/english/products/pdfs/e-uwx.pdf, Digikey=https://www.digikey.com/product-detail/en/nichicon/UWX1C100MCL2GB/493-2099-1-ND/590074
C48 C49: "Capacitor", Supplier Part Number 1=1276-2872-1-ND, LatestRevisionDate=17-Jul-2002, LatestRevisionNote="Re-released for DXP Platform.", PackageDescription="Radial Cap, Thru-Hole; 2 Leads; 0.3 in Pin Spacing", PackageReference=RAD-0.3, Published=8-Jun-2000, Publisher="Altium Limited", Supplier 1=Digi-Key
C50: "Capacitor", Supplier Part Number 1=1276-1921-1-ND, LatestRevisionDate=17-Jul-2002, LatestRevisionNote="Re-released for DXP Platform.", PackageDescription="Radial Cap, Thru-Hole; 2 Leads; 0.3 in Pin Spacing", PackageReference=RAD-0.3, Published=8-Jun-2000, Publisher="Altium Limited", Supplier 1=Digi-Key
C51 C52: "Capacitor", Supplier Part Number 1=490-16375-1-ND, LatestRevisionDate=17-Jul-2002, LatestRevisionNote="Re-released for DXP Platform.", PackageDescription="Radial Cap, Thru-Hole; 2 Leads; 0.3 in Pin Spacing", PackageReference=RAD-0.3, Published=8-Jun-2000, Publisher="Altium Limited", Supplier 1=Digi-Key
C53: "Capacitor", Supplier Part Number 1=1276-1001-1-ND, LatestRevisionDate=17-Jul-2002, LatestRevisionNote="Re-released for DXP Platform.", PackageDescription="Radial Cap, Thru-Hole; 2 Leads; 0.3 in Pin Spacing", PackageReference=RAD-0.3, Published=8-Jun-2000, Publisher="Altium Limited", Supplier 1=Digi-Key
C54: "Capacitor (Semiconductor SIM Model)", Supplier Part Number 1=490-4761-1-ND, LatestRevisionDate=29-May-2009, LatestRevisionNote="IPC-7351 Footprint Added.", PackageDescription="Chip Capacitor", PackageReference=C1206, Published=8-Jun-2000, Publisher="Altium Limited", Supplier 1=Digi-Key
D2 D3 D7 D8: library part 1N58xx, "1A Schottky Barrier Rectifier Diode", Datasheet=http://www.kesenes.com/pdf/1n5817-1n5819.pdf
D4 D9: library part MMSZ5230BT1G, "Zener Voltage Regulator, 500 mW, 2-Pin SOD-123, Pb-Free, Tape and Reel", Manufacturer="On Semiconductor", Supplier Part Number 1=MMSZ5230BT1GOSTR-ND, ComponentLink1Description="Manufacturer URL", ComponentLink1URL=http://www.onsemi.com/, ComponentLink2Description=Datasheet, ComponentLink2URL=http://www.onsemi.com/pub_link/Collateral/MMSZ5221BT1-D.PDF, ComponentLink3Description="Package Specification", ComponentLink3URL=http://www.onsemi.com/pub_link/Collateral/425-04.PDF, DatasheetVersion="Rev. 12", Mounting Technology="Surface Mount", PackageDescription="2-Pin SOD, Body 1.6 x 2.69 mm", PackageReference=SOD-123-2-425-04, PackageVersion="Rev. G, 10/2009", Packing="Tape and Reel", PartNumber=MMSZ5230BT1G, P Max (W)=0.5, RoHS=Pb-Free, Supplier 1=Digi-Key, Supplier 2=Digi-Key, Supplier 3=Digi-Key, Supplier 4=Farnell, Supplier 5=Farnell, Supplier 6=Farnell, Supplier 7=Newark, Supplier 8=Newark, Supplier 9=Mouser, Supplier Part Number 2=MMSZ5230BT1GOSCT-ND, Supplier Part Number 3=MMSZ5230BT1GOSDKR-ND, Supplier Part Number 4=1431272, Supplier Part Number 5=1431272RL, Supplier Part Number 6=2370826, Supplier Part Number 7=83H7423, Supplier Part Number 8=67R1368, Supplier Part Number 9=863-MMSZ5230BT1G, VZ Typ (V)=4.7
D5 D6 D10 D11: "Schottky Rectifier", Datasheet=https://www.mouser.com/ds/2/308/MBRS340-1120985.pdf
D12: library part BAS170W, "DIODE SCHOTTKY 70V 70MA SOD323-2", ComponentLink1Description=Digi-Key, ComponentLink1URL=https://www.digikey.com/product-detail/en/infineon-technologies/BAS170WE6327HTSA1/BAS170WE6327HTSA1CT-ND/3819495, ComponentLink2Description=Datasheet, ComponentLink2URL=https://www.infineon.com/dgdl/Infineon-BAS70series-DataSheet-v01_00-EN.pdf?fileId=5546d4626d66c2b1016d73f7ecf220d6&redirId=117942
D13: "LED RGB Strip - Bare Nonaddressable", Sparkfun Link=https://www.sparkfun.com/products/12021
D14 D15 D16: "1A Schottky Barrier Rectifier Diode", Datasheet=http://www.kesenes.com/pdf/1n5817-1n5819.pdf, Digikey=https://www.digikey.com/product-detail/en/comchip-technology/SS24-HF/641-SS24-HFCT-ND/10443817
J1 J2 J3 J4 J5 J6 J7 J8: library part Molex43045-0402, "Micro-Fit 3.0 Right Angle Header, 3.00mm Pitch, Dual Row, 4 Circuits, with Snap-in Plastic Peg PCB Lock, Gold, Glow Wire Capable, Black", ComponentLink1Description="Molex Website", ComponentLink1URL=https://www.molex.com/molex/products/datasheet.jsp?part=active/0430450402_PCB_HEADERS.xml
L1 L2: "15µH Shielded Molded Inductor 14A 14.4 mOhm Max Nonstandard", Datasheet=http://www.vishay.com/docs/34306/lp67dz11.pdf, Digikey=https://www.digikey.com/product-detail/en/vishay-dale/IHLP6767GZER150M11/541-1287-1-ND/2139413
L3: library part PQ2617BHA-330K, "33µH Shielded Wirewound Inductor 28A 2.5mOhm Max Nonstandard", ComponentLink1Description=Datasheet, ComponentLink1URL=https://www.bourns.com/docs/Product-Datasheets/PQ2617.pdf, ComponentLink2Description=Digi-Key, ComponentLink2URL=https://www.digikey.com/product-detail/en/bourns-inc/PQ2617BHA-330K/PQ2617BHA-330K-ND/7695918
P2 P3: library part "Header 8X3 (2mm)", "Connector Header Through Hole 24 position 0.079\" (2.00mm)", Digikey=https://www.digikey.com/product-detail/en/samtec-inc/TMMH-108-01-T-T/SAM12190-ND/6692344, Drawing=http://suddendocs.samtec.com/prints/tmmh-1xx-xx-xx-x-xxx-mkt.pdf
P4 P6 P7 P9: "Header, 4-Pin", LatestRevisionDate=17-Jul-2002, LatestRevisionNote="Re-released for DXP Platform.", Publisher="Altium Limited"
  P7: Digikey=https://www.digikey.com/product-detail/en/DF13-4P-1.25DSA/H2193-ND/241767
P5: library part "Header 4", "Header, 4-Pin", Digikey=https://www.digikey.com/product-detail/en/DF13-4P-1.25DSA/H2193-ND/241767, LatestRevisionDate=17-Jul-2002, LatestRevisionNote="Re-released for DXP Platform.", Publisher="Altium Limited"
P8: library part "JTAG Header", "CONN HEADER 10POS DUAL .05\" SMD", Datasheet=http://suddendocs.samtec.com/catalog_english/ftsh_smt.pdf, Digikey Link=https://www.digikey.com/product-detail/en/samtec-inc/FTSH-105-01-L-DV-K-TR/SAM13165CT-ND/8827920, Drawings=http://suddendocs.samtec.com/prints/ftsh-1xx-xx-xxx-dv-xxx-xxx-mkt.pdf
Q2 Q3 Q4 Q5 Q6 Q7 Q8 Q9: "N-Channel TrenchMOS Intermediate Level FET, 40 V, 50 A, 3-Pin SOT428, Tape and Reel", Manufacturer="NXP Semiconductors", PartNumber=BUK6212-40C,118, Supplier Part Number 1=568-6983-2-ND, Automotive Qualified=Y, Channel Type=N, Code_JEDEC=TO-252, Code_JEITA=SC-63, ComponentLink1Description="Manufacturer URL", ComponentLink1URL=http://www.nxp.com/, ComponentLink2Description=Datasheet, ComponentLink2URL=http://www.nxp.com/documents/data_sheet/BUK6212-40C.pdf, ComponentLink3Description="Package Specification", ComponentLink3URL=http://www.nxp.com/documents/outline_drawing/sot428_po.pdf, DatasheetVersion="Rev. 2", ID [max] (A)=50, IDM [max] (A)=233, Mounting Technology="Surface Mount", PackageDescription="3-Pin Plastic Single-ended Surface Mounted Package, Body 6.1 x 6.6 mm, Pitch 2.285 mm", PackageReference=SOT428, PackageVersion="14-06-10, 06/2014", Packing="Tape & Reel", Qr [typ] (nC)=38, Supplier 1=Digi-Key, Supplier 2=Digi-Key, Supplier 3=Digi-Key, Supplier 4=Mouser, Supplier Part Number 2=568-6983-1-ND, Supplier Part Number 3=568-6983-6-ND, Supplier Part Number 4=771-BUK621240C118, VDS [max] (V)=40, VGSth [typ] (V)=2.3
Q10 Q11: library part BSC028N06LS3, ComponentLink1Description=Datasheet, ComponentLink1URL=https://www.mouser.com/datasheet/2/196/Infineon-BSC028N06LS3-DS-v02_02-en-1226498.pdf
Q12 Q13 Q14 Q15 Q16 Q17: "12V N-Channel Enhancement Mode MOSFET", Datasheet=https://www.diodes.com/assets/Datasheets/DMN1019USN.pdf, Digikey=https://www.digikey.com/product-detail/en/diodes-incorporated/DMN1019USN-13/DMN1019USN-13DICT-ND/4898885
R2 R3 R4 R5 R6 R7 R8 R9 R10 R11 R12 R13 R14 R15 R16 R17 R18 R19 R20 R21 R22 R23 R24 R25 R26 R27 R28 R29 R30 R31 R32 R33 R34 R35 R36 R37 R38 R39 R40 R41 R42 R43: "Resistor", LatestRevisionDate=29-May-2009, LatestRevisionNote="IPC-7351 Footprint Added.", PackageDescription="Chip Resistor", PackageReference=J1-0603, Published=8-Jun-2000, Publisher="Altium Limited"
U1 U2: "Buck-boost Controller, Constant Frequency, Current Mode Control with Power Good Output, 24-pin SOP (G-24), -40 to 85 degC, Pb-Free", Frequency Sync Range="200kHz - 400kHz", Manufacturer="Linear Technology", Supplier Part Number 1=LTC3780EG#PBF-ND, ComponentLink1Description="Manufacturer URL", ComponentLink1URL=http://www.linear.com/, ComponentLink2Description=Datasheet, ComponentLink2URL=http://cds.linear.com/docs/en/datasheet/3780ff.pdf, ComponentLink3Description="Package Specification", ComponentLink3URL=http://cds.linear.com/docs/en/packaging/SSOP_24_05-08-1640.pdf, DatasheetVersion="Rev. F", Mounting Technology="Surface Mount", Number of Outputs=1, PackageDescription="24-Pin Plastic SSOP, Body 8.2 x 5.3 mm, Pitch 0.65 mm", PackageReference=G-24, PackageVersion=Jun-10, PartNumber=LTC3780EG#PBF, RoHS=TRUE, Supplier 1=Digi-Key, Supplier 2=Farnell, Supplier 3=Newark, Supplier Part Number 2=1273545, Supplier Part Number 3=56M8395
U3: "48V Switching converter", ComponentLink1Description="Analog Devices", ComponentLink1URL=https://www.analog.com/en/products/ltc3769.html#, ComponentLink2Description=Datasheet, ComponentLink2URL=https://www.analog.com/media/en/technical-documentation/data-sheets/3769fa.pdf
U4: "ARM® Cortex®-M4 Pearl Gecko Microcontroller IC 32-Bit 40MHz 1MB (1M x 8) FLASH 48-QFN (7x7)", Package="QFN-48 Silicon Labs", Availability=Unavailable, ComponentLink1Description=Digi-Key, ComponentLink1URL=https://www.digikey.com/product-detail/en/silicon-labs/EFM32PG12B500F1024IM48-C/336-5333-ND/8161157, MF="Silicon Labs", MP=EFM32PG12B500F1024GM48-B, Price=None, SnapEDA_Link=https://www.snapeda.com/parts/EFM32PG12B500F1024GM48-B/Silicon%20Labs/view-part/?ref=snap
U5: library part R-78Exx-1.0, "1A DC/DC Voltage Converter", Datasheet=https://www.recom-power.com/pdf/Innoline/R-78Exx-0.5.pdf
U6: "USB - micro B USB 2.0 Receptacle Connector 5 Position Surface Mount, Right Angle", Datasheet=https://www.molex.com/pdm_docs/sd/1050170001_sd.pdf, Digikey=https://www.digikey.com/product-detail/en/molex-llc/1050170001/WM1399CT-ND/2350885
U7: library part "FTDI FT230x", "USB to Basic UART IC", Datasheet=https://www.ftdichip.com/Support/Documents/DataSheets/ICs/DS_FT230X.pdf
U8: library part R-78Exx-0.5, "0.5A DC/DC Voltage Converter", Datasheet=https://www.recom-power.com/pdf/Innoline/R-78Exx-0.5.pdf, Digikey=https://www.digikey.com/product-detail/en/recom-power/R-78E9-0-0-5/945-2638-5-ND/6010095

## Free pads (board coordinates)
  round 200 hole 200 unplated: ""(4005,4800) ""(6400,2700) ""(7350,4800) ""(8475,2700)

## Via types
v1: diameter 50, hole 28, Top Layer to Bottom Layer, 45 vias
v2: diameter 35, hole 15, Top Layer to Bottom Layer, 37 vias
v3: diameter 30, hole 15, Top Layer to Bottom Layer, 35 vias
v4: diameter 70, hole 50, Top Layer to Bottom Layer, 19 vias

## Nets (pads, with @x,y where several pads share a name; then routed paths per layer and width w, separated by ;. In a path a pad name is that pad's centre, name@x,y a point inside that pad or via, vN(x,y) a via of type N, cw(c..) or ccw(c..) an arc to the next point about the centre after c; other vN are vias at no path point)
3V3: C43.2 C44.2 C45.2 C46.2 C47.2 C49.2 P2.2 P2.5 P2.8 P2.11 P2.14 P2.17 P2.20 P2.23 P3.2 P3.5 P3.8 P3.11 P3.14 P3.17 P3.20 P3.23 P5.4 P7.4 P8.1 R18.2 R33.1 R34.1 U4.9 U4.34 U4.39 U4.40 U4.42 U5.3 | length 1648.9
  Top Layer w6: P3.23@9300,4798.15 9300,4783.15 9255,4738.15 9255,4663.15 9300,4618.15 P8.1@9475,4618.15 ; C47.2@9923.15,4031.3 C47.2@9923.15,4058.15
  Top Layer w10: U5.3@9515,3911.3 9546.3,3942.6 C49.2@9680,3942.6 ; v2(9885,3993.15) C47.2@9923.15,4031.3 ; R18.2@9909.06,3368.15 9915,3374.09 v1(9915,3473.15) ; C47.2@9915,4083.94 U4.9@9994.76,4083.94 ; C46.2@10070,4415 10139.84,4345.16 10139.84,4333.15 ; v2(10110,4333.15) 10139.84,4333.15 ; U4.42@10139.84,4268.39 10139.84,4333.15 ; U4.40@10179.21,4268.39 U4.39@10198.9,4268.39 10198.9,4373.9 C45.2@10240,4415 C43.2@10325,4415 10305,4395 v2(10305,4363.15) ; R33.1@10200,3828.62 10200,3808.15 v2(10225,3783.15) 10250,3808.15 R34.1@10250,3828.62 ; U4.34@10265.24,4202.05 10308.9,4202.05 C44.2@10335,4228.15 ; C44.2@10336.85,4228.15 10385.65,4276.95 v2(10385.65,4292.5)
9V: C2.2 J1.3 J1.4 U8.3 | length 476
  Top Layer w10: U8.3@10265,2745 10300,2710 C2.2@10300,2605
  Top Layer w30: U8.3@10265,2745 10445.87,2745 J1.4@10461.81,2760.94 J1.3@10461.81,2879.06
12V: C13.2 C14.1 D6.K D13.1 D14.K D15.K D16.K J4.4 J5.3 J5.4 P4.4 P9.1 Q5.D R9.2 | length 7760
  Top Layer w10: v1(7702.39,4510.53) R9.2@7702.39,4571.01 ; D14.K@10884.21,4965 D14.K@10885,4965.79
  Top Layer w30: 10035,4970 D13.1@10120,4885
  Top Layer w50: J5.3@7784.06,2948.11 7906.89,2948.11 7930,2925 ; J4.4@7995,2764.96 7995,2860 7930,2925 ; 10455,4965 10535,4885 10535,4780 10595,4720 10595,4705 ; D14.K@10884.21,4965 D15.K@10750,4965 D16.K@10610,4965 10600,4975 9265,4975 9195,4905 v1(9195,3580) 9195,2970 9150,2925 7930,2925
  Bottom Layer w10: v1(7557.39,3790.53) 7557.39,3835.53 7542.39,3850.53 7542.39,4350.53 v1(7702.39,4510.53)
  Bottom Layer w30: v1(9195,3580) 9240,3535 9740,3535 9860,3415 10101.38,3415 P4.4@10249.53,3563.15
19V: C25.2 C26.1 D11.K J2.3 J2.4 J8.3 J8.4 Q9.D R19.2 | length 635.1
  Top Layer w10: 5785,3910 5785,4325.94 R19.2@5940,4480.94
48V: C35.2 C36.2 C37.1 C38.2 C39.1 C40.2 C41.2 J3.3 J3.4 Q11.5 Q11.6 Q11.7 Q11.8 Q11.9 R23.1 | length 1330.3
  Top Layer w10: Q11.9@4530,3160 Q11.9@4590,3100
  Top Layer w20: v1(4790,3965) 4795,3965 4860,4030 R23.1@4915.94,4030
  Top Layer w40: Q11.9@4590,3100 4650,3100
  Battery Voltage w10: J3.3@4804.06,2943.19 J3.3@4810,2949.13
  Battery Voltage w20: v1(4790,3965) 4790,2969.13 J3.3@4810,2949.13
BG: Q10.4 U3.16 | length 410.3
  Top Layer w10: Q10.4@5147.8,3449.8 5158.62,3449.8 5168.39,3459.57 5168.39,3493.39 5222.64,3547.64 U3.16@5222.64,3822.72
BG1-12V: Q4.G U1.18 | length 986.7
  Top Layer w6: v3@8624.75,4673.17 v3(8627.39,4670.53)
  Top Layer w10: v1(8282.39,4245.53) 8282.54,4245.38 Q4.G@8282.54,4155.06 ; U1.18@8528.25,4673.17 v3@8624.75,4673.17
  Bottom Layer w10: v1(8282.39,4245.53) 8387.39,4245.53 8527.39,4385.53 8677.39,4385.53 8722.39,4430.53 8722.39,4575.53 v3(8627.39,4670.53)
BG1-19V: Q8.G U2.18 | length 922.1
  Top Layer w10: Q8.G@6560.16,4049.53 6560.16,4140.16 v1(6565,4145) ; U2.18@6623.86,4587.2 6718.15,4587.2 6780.36,4525 v3(6860,4525)
  Bottom Layer w10: v1(6565,4145) 6565,4160 6750,4345 6825,4345 6880,4400 6880,4505 v3(6860,4525)
BG2-12V: Q3.G U1.16 | length 778.1
  Top Layer w6: U1.16@8528.25,4621.99 8623.84,4621.99 v3(8627.39,4625.53)
  Top Layer w10: v1(8617.39,4245.53) 8617.54,4245.38 Q3.G@8617.54,4155.06
  Battery Voltage w10: v1(8617.39,4245.53) 8787.39,4415.53 8787.39,4585.53 8747.39,4625.53 v3(8627.39,4625.53)
BG2-19V: Q7.G U2.16 | length 666.5
  Top Layer w10: U2.16@6623.86,4536.02 6683.98,4536.02 v3(6690,4530) ; v1(6950,4145) 6950.16,4144.84 Q7.G@6950.16,4054.53
  Battery Voltage w10: v3(6690,4530) 6690,4510 6730,4470 6730,4340 6925,4145 v1(6950,4145)